# Altium PCB TranRei.PcbDoc
Units mm, origin at the board's own origin, x right, y up, seen from the top; angles counter-clockwise.
Board outline 152.4 x 101.6 mm, 2 copper layers (Top Layer, Bottom Layer); 32 components, 22 nets, 127 pads, 0 vias.
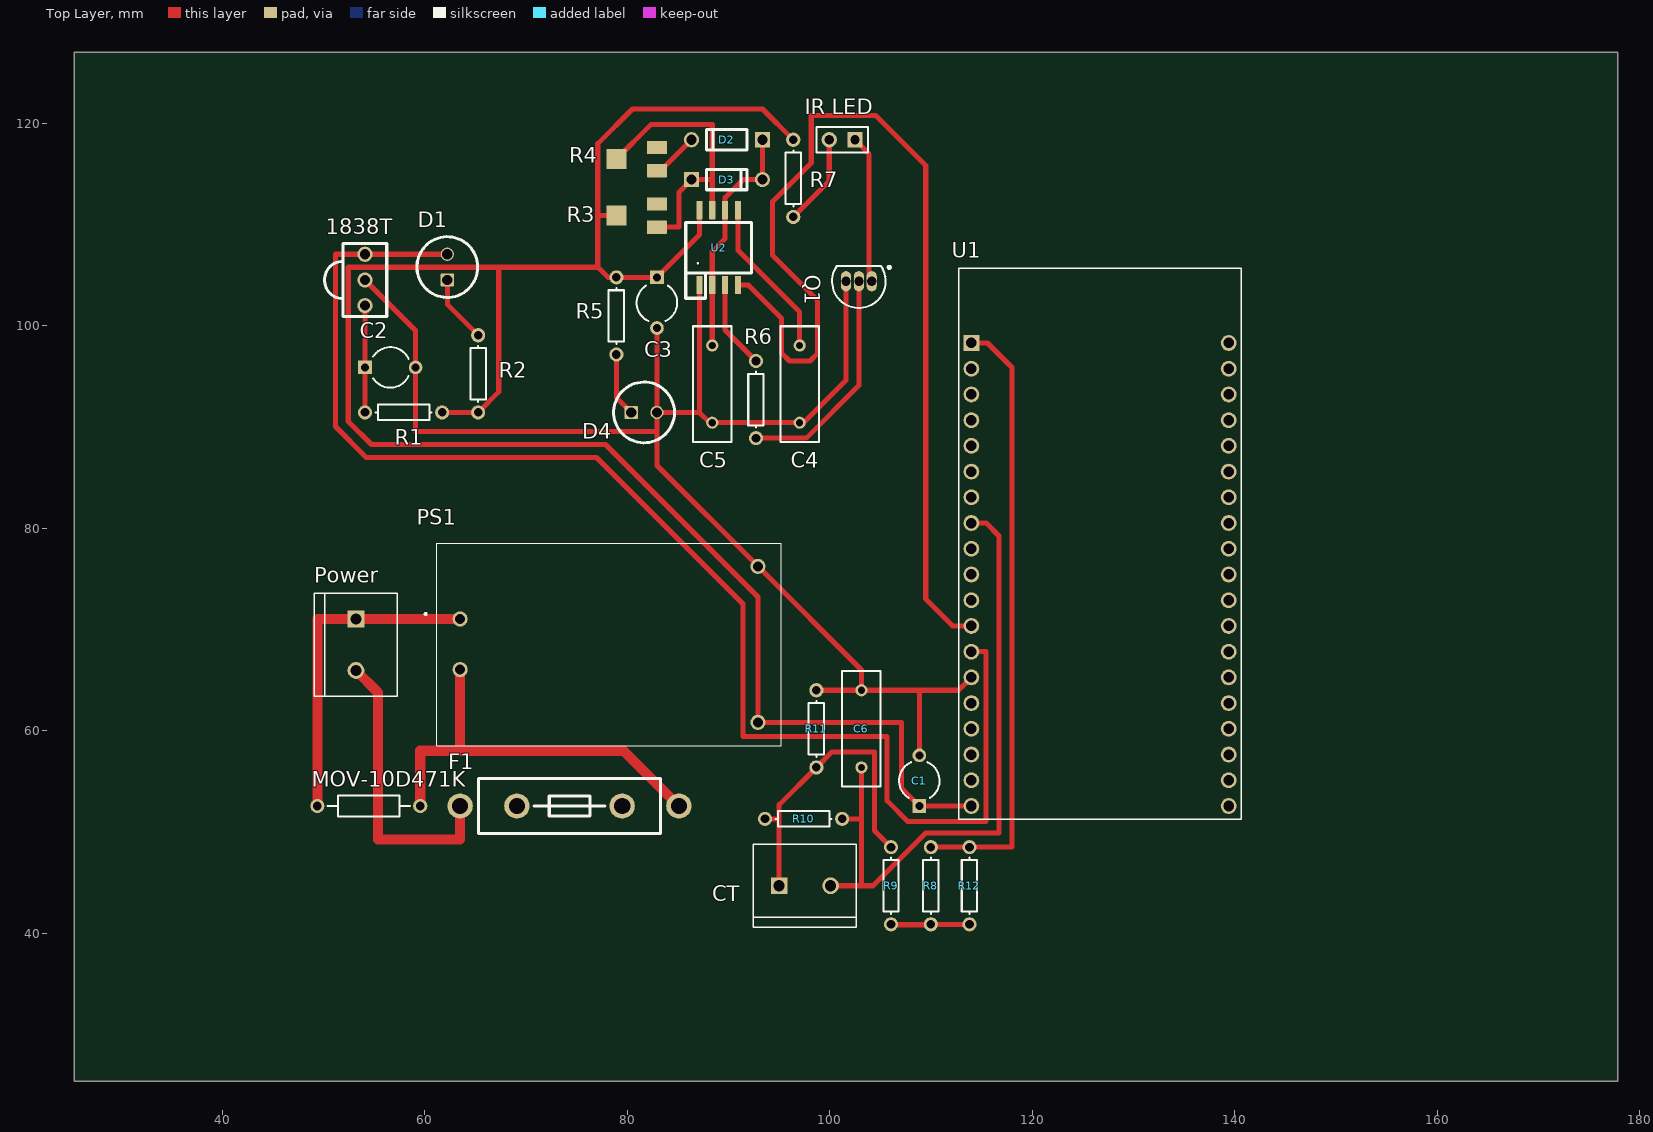
[diagram p0: Top Layer view]
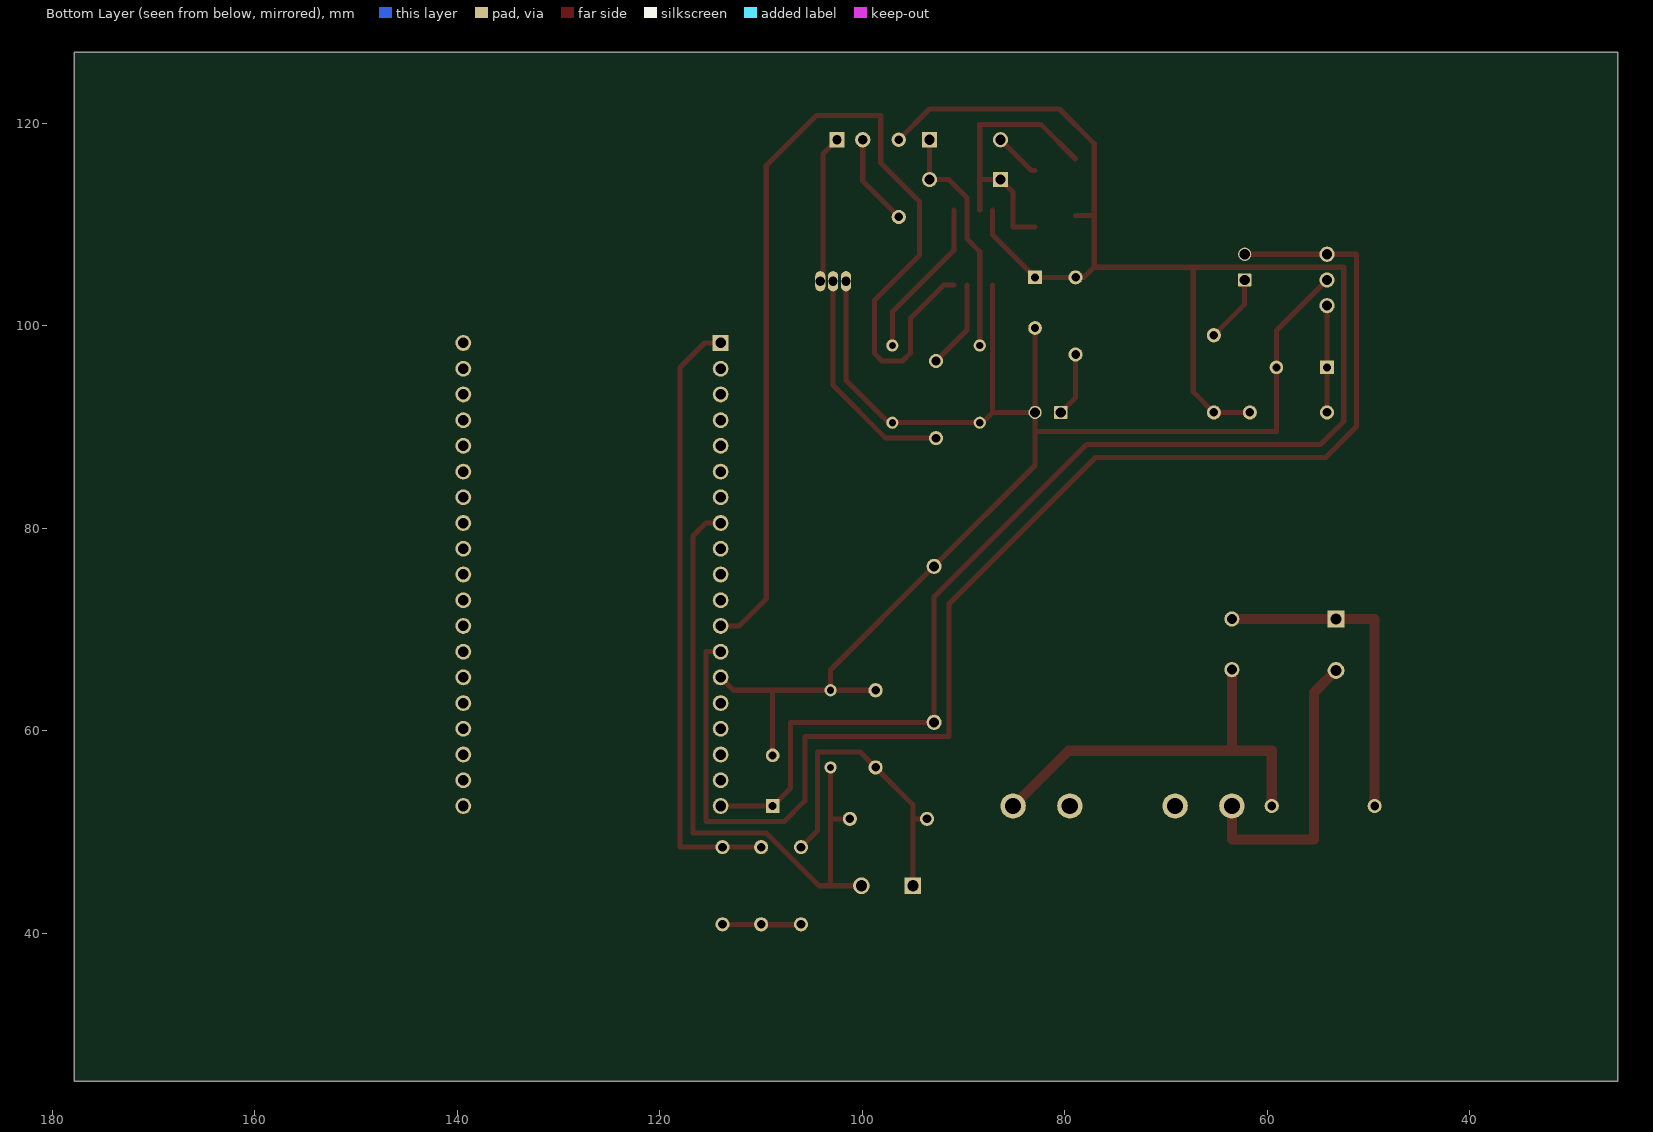
[diagram p1: Bottom Layer view, seen from below]

## Layer stack, top to bottom
Top Solder: solder mask 0.0102, Solder Resist, Dk 3.5
Top Layer: signal copper 0.0356
Dielectric 1: dielectric 0.32, FR-4, Dk 4.8
Bottom Layer: signal copper 0.0356
Bottom Solder: solder mask 0.0102, Solder Resist, Dk 3.5

## Board outline
25.4,25.4 177.8,25.4 177.8,127 25.4,127

## Design rules (kind name [scope] priority, off if disabled: settings)
Clearance [All] p1: gap=0.254 ignorepadtopadclearanceinfootprint=FALSE except(0: Arc-Hole Track-Hole SMDPad-Hole THPad-Hole Via-Hole Fill-Hole Poly-Hole Region-Hole Text-Hole)
PolygonConnect [All] p1: connectstyle=Relief reliefconductorwidth=0.254 reliefentries=4 polygonreliefangle="90 Angle" airgapwidth=0.254
RoutingVias [All] p1: holewidth=0.711 width=1.27 viastyle="Through Hole" minholewidth=0.711 minwidth=1.27 maxholewidth=0.711 maxwidth=1.27
SolderMaskExpansion [All] p1: expansion=0.102
Width [All] p1: maxlimit=1 minlimit=0.3 preferedwidth=0.5
30 further rules are at their usual default settings.

## Components (designator, comment, footprint, x,y, rotation, side; value= is the part's Value field where it differs from the comment)
1838T "Header 3" "TSOP 1838T" 54.102,104.521 r270 top
C1 "Cap2" CAPR5-4X5 108.839,55.078 r90 top value=220uF
C2 "Cap2" CAPR5-4X5 56.602,95.885 r0 top value=100uF
C3 "Cap2" CAPR5-4X5 82.931,102.275 r270 top value=100uF
C4 "Cap" RAD-0.3 97.028,94.234 r90 top value=100nF
C5 "Cap" RAD-0.3 88.392,94.234 r90 top value=1nF
C6 "Cap" RAD-0.3 103.124,60.198 r270 top value=100nF
CT "282837-2" TE_282837-2 97.536,44.704 r0 top
D1 "LED" LED 62.23,105.791 r90 top
D2 "Diode 1N4148" Diode 89.845,118.364 r180 top
D3 "Diode 1N4148" Diode 89.845,114.427 r0 top
D4 "LED" LED 81.661,91.44 r0 top
F1 "Fuse" "Fuse Holder" 74.3,52.578 r180 top
"IR LED" "Header 2" HDR1X2 102.489,118.364 r180 top
MOV-10D471K "" AXIAL-0.4 54.483,52.578 r180 top value=1K
Power "282837-2" TE_282837-2 53.213,68.5 r270 top
PS1 "HLK-PM01" HLKPM01 63.5,71.04 r0 top
Q1 "BC547" TO-226-AA 102.87,104.394 r90 top
R1 "Res1" AXIAL-0.3 57.912,91.44 r0 top value=100R
R2 "Res1" AXIAL-0.3 65.278,95.25 r270 top value=1K2
R3 "Res Tap" "Square Trimpot" 80.931,110.878 r90 top value=10K
R4 "Res Tap" "Square Trimpot" 80.931,116.459 r90 top value=20K
R5 "Res1" AXIAL-0.3 78.931,100.965 r270 top value=1K2
R6 "Res1" AXIAL-0.3 92.71,92.71 r270 top value=10K
R7 "Res1" AXIAL-0.3 96.393,114.554 r90 top value=1K2
R8 "Res1" AXIAL-0.3 109.982,44.704 r90 top value=1K
R9 "Res1" AXIAL-0.3 106.045,44.704 r270 top value=2K2
R10 "Res1" AXIAL-0.3 97.409,51.308 r0 top value=100K
R11 "Res1" AXIAL-0.3 98.679,60.198 r270 top value=1K
R12 "Res1" AXIAL-0.3 113.792,44.704 r90 top value=1K
U1 "ESP32-DEVKITC-32D" MODULE_ESP32-DEVKITC-32D 126.683,78.538 r0 top
U2 "NE555P" "NE555 SOP" 89.027,107.713 r0 top

## Footprints (in the part's own frame and the unit in brackets; to place one, negate y for a bottom-side part, rotate by r counter-clockwise, add the part's x,y. Pads: shape width x height; smd on the part's side, far side on the other; paste and mask are expansions set on the pad)
AXIAL-0.3 [mm] "Axial Device, Thru-Hole; 2 Leads; 0.3 in Pin Spacing"
  round 1.4 hole 0.85: 1(-3.81,0) 2(3.81,0)
  silkscreen extent -2.77,-0.76 2.77,0.76
AXIAL-0.4 [mm] "Axial Device, Thru-Hole; 2 Leads; 0.4 in Pin Spacing"
  round 1.4 hole 0.85: 1(-5.08,0) 2(5.08,0)
  silkscreen extent -4.06,-1.02 4.06,1.02
CAPR5-4X5 [mm] "Capacitor; 2 Leads"
  rect 1.35x1.35 hole 0.8: 1(-2.5,0)
  round 1.35 hole 0.8: 2(2.5,0)
  silkscreen extent -1.69,-2 1.82,2
Diode [mm] "1N4448"
  rect 1.5x1.5 hole 1 mask+0.1: 1(-3.5,0) 1(-3.5,0)
  round 1.5 hole 1 mask+0.1: 2(3.5,0)
  silkscreen extent -2,-1 2,1
"Fuse Holder" [mm] "5x20mm"
  round 2.5 hole 1.6 mask+0.2: 1(-10.8,0) 1(-10.8,0) 1(-10.8,0) 1(-10.8,0) 1(-10.8,0) 1(-10.8,0) 2(-5.2,0) 2(-5.2,0) 3(5.2,0) 4(10.8,0)
  silkscreen extent -9,-2.7 9,2.7
HDR1X2 [mm] "Connector; Header; 2 Position"
  rect 1.5x1.5 hole 0.9: 1(0,0)
  round 1.5 hole 0.9: 2(2.54,0)
  silkscreen extent -1.27,-1.27 3.81,1.27
HLKPM01 [mm]
  round 1.5 hole 1: 1(0,0) 2(0,-5) 3(29.4,5.2) 4(29.4,-10.2)
  silkscreen extent -3.5,-12.5 31.7,7.5
LED [mm] "LED"
  rrect10% 1.3x1.3 hole 1 mask+0.1: 1(-1.27,0)
  round 1.3 hole 1 mask+0.1: 2(1.27,0)
  silkscreen extent -3,-3 3,3
MODULE_ESP32-DEVKITC-32D [mm]
  rect 1.56x1.56 hole 1.04: 1(-12.7,19.76)
  round 1.56 hole 1.04: 2(-12.7,17.22) 3(-12.7,14.68) 4(-12.7,12.14) 5(-12.7,9.6) 6(-12.7,7.06) 7(-12.7,4.52) 8(-12.7,1.98) 9(-12.7,-0.56) 10(-12.7,-3.1) 11(-12.7,-5.64) 12(-12.7,-8.18) 13(-12.7,-10.72) 14(-12.7,-13.26) 15(-12.7,-15.8) 16(-12.7,-18.34) 17(-12.7,-20.88) 18(-12.7,-23.42) 19(-12.7,-25.96) 20(12.7,19.76) 21(12.7,17.22) 22(12.7,14.68) 23(12.7,12.14) 24(12.7,9.6) 25(12.7,7.06) 26(12.7,4.52) 27(12.7,1.98) 28(12.7,-0.56) 29(12.7,-3.1) 30(12.7,-5.64) 31(12.7,-8.18) 32(12.7,-10.72) 33(12.7,-13.26) 34(12.7,-15.8) 35(12.7,-18.34) 36(12.7,-20.88) 37(12.7,-23.42) 38(12.7,-25.96)
  silkscreen extent -13.95,-27.25 13.95,27.15
"NE555 SOP" [mm] "PS G8"
  rrect10% 0.6x1.8 smd mask+0.07: 1(-1.905,-3.7) 1(-1.905,-3.7) 2(-0.635,-3.7) 3(0.635,-3.7) 4(1.905,-3.7) 5(1.905,3.7) 6(0.635,3.7) 7(-0.635,3.7) 8(-1.905,3.7)
  Top Layer region: -0.635,-3.065
  Top Layer region: -0.635,-5.097
  silkscreen extent -3.25,-5 3.25,2.5
RAD-0.3 [mm] "Radial Cap, Thru-Hole; 2 Leads; 0.3 in Pin Spacing"
  round 1.2 hole 0.7: 1(-3.81,0) 2(3.81,0)
  silkscreen extent -5.71,-1.91 5.71,1.91
"Square Trimpot" [mm] "3314J-1"
  rrect10% 1.3x2 smd: 1(-1.15,-2) 1(-1.15,-2) 1(-1.15,-2) 2(1.15,-2)
  rrect10% 2x2 smd: 3(0,2)
TE_282837-2 [mm]
  rect 1.65x1.65 hole 1.1: 1(-2.54,0)
  round 1.65 hole 1.1: 2(2.54,0)
  silkscreen extent -5.08,-4.1 5.08,4.1
TO-226-AA [mm] "TO, Flat Index; 3 In-Line, Axial Leads; Body Dia. 4.8mm; Leads 0.55 x 0.51 mm (max)"
  oval 2x1 hole 0.9: 1(0,-1.27) 2(0,0) 3(0,1.27)
  silkscreen extent -2.65,-3.13 1.52,2.65, body extent -2.65,-2.66 1.52,2.66, height 5.33
"TSOP 1838T" [mm] "IR Receiver"
  round 1.5 hole 1 mask+0.1: 1(-2.54,0) 2(0,0) 3(2.54,0)
  silkscreen extent -3.6,-4 3.6,2.15

## Part data
1838T: "Header, 3-Pin", LatestRevisionDate=17-Jul-2002, LatestRevisionNote="Re-released for DXP Platform.", Publisher="Altium Limited"
C1 C2 C3 C4 C5 C6: "Capacitor", Publisher="Altium Limited"
  C1 C2 C3: PackageDescription="Capacitor; 2 Leads", PackageReference=CAPR5-4X5, Published=23-Sep-2002
  C4 C5 C6: LatestRevisionDate=17-Jul-2002, LatestRevisionNote="Re-released for DXP Platform.", PackageDescription="Radial Cap, Thru-Hole; 2 Leads; 0.3 in Pin Spacing", PackageReference=RAD-0.3, Published=8-Jun-2000
CT Power: "Connector Terminal Blocks Receptacle 2 Position 5.08mm Solder Straight Thru-Hole 13.5A/Contact", Package=None, Digi-Key_Part_Number=A113320-ND, Digi-Key_Purchase_URL=https://www.digikey.in/product-detail/en/te-connectivity-amp-connectors/282837-2/A113320-ND/2187973?utm_source=snapeda&utm_medium=aggregator&utm_campaign=symbol, MF="TE Connectivity", MP=282837-2, SnapEDA_Link=https://www.snapeda.com/parts/282837-2/TE%20Connectivity%20AMP%20Connectors/view-part/2549980/?ref=snap, TE_purchase_URL=https://www.te.com/usa-en/product-282837-2.html?te_bu=Cor&te_type=disp&te_campaign=seda_glo_cor-seda-global-disp-prtnr-fy19-seda-model-bom-cta_sma-317_1&elqCampaignId=32493
D1 D4: library part LED0, "Typical INFRARED GaAs LED", LatestRevisionDate=08-Jul-2005, LatestRevisionNote="Mech Layer 1 removed.", PackageDescription="LED; 2 Leads", PackageReference=LED-0, Published=8-Jun-2000, Publisher="Altium Limited"
D2 D3: library part "Diode 1N4448", "High Conductance Fast Diode", Code_JEDEC=DO-204-AH, ComponentLink1Description="Manufacturer Link", ComponentLink1URL=http://www.fairchildsemi.com/, ComponentLink2Description=Datasheet, ComponentLink2URL=http://www.fairchildsemi.com/ds/1N%2F1N4448.pdf, DatasheetVersion=1997, LatestRevisionDate=17-Jul-2002, LatestRevisionNote="Re-released for DXP Platform.", PackageDescription="Diode, Axial; Body 3.8 x 1.9 mm (LxDia. max), Lead Dia. 0.53 mm (max)", PackageReference=DO-35, Published=8-Jun-2000, Publisher="Altium Limited"
F1: library part "Fuse 2", LatestRevisionDate=17-Jul-2002, LatestRevisionNote="Re-released for DXP Platform.", PackageDescription="Thru-Hole; 2 Leads", PackageReference=PIN-W2/E2.8, Published=8-Jun-2000, Publisher="Altium Limited"
"IR LED": "Header, 2-Pin", LatestRevisionDate=17-Jul-2002, LatestRevisionNote="Re-released for DXP Platform.", Publisher="Altium Limited"
MOV-10D471K: library part Res2, "Resistor", LatestRevisionDate=17-Jul-2002, LatestRevisionNote="Re-released for DXP Platform.", PackageDescription="Axial Device, Thru-Hole; 2 Leads; 0.4 in Pin Spacing", PackageReference=AXIAL-0.4, Published=8-Jun-2000, Publisher="Altium Limited"
PS1: "<b>Ultra-compact power module</b><p> Source: <a href=\"https://datasheet.lcsc.com/szlcsc/1906201102_HI-LINK-HLK-PM03_C209904.pdf\"> Datasheet </a>", Package="Package Analog Devices", Availability=Unavailable, MF=Hi-link, MP=hlk-pm01, Price=None, SnapEDA_Link=https://www.snapeda.com/parts/hlk-pm01/Hi-link/view-part/2875605/?ref=snap
Q1: library part NPN, "NPN Bipolar Transistor", Code_JEDEC=TO-226-AA, LatestRevisionDate=17-Jul-2002, LatestRevisionNote="Re-released for DXP Platform.", PackageDescription="TO, Flat Index; 3 In-Line, Axial Leads; Body Dia. 4.8mm; Leads 0.55 x 0.51 mm (max)", PackageReference=TO-226-AA, Published=8-Jun-2000, Publisher="Altium Limited"
R1 R2 R5 R6 R7 R8 R9 R10 R11 R12: "Resistor", LatestRevisionDate=17-Jul-2002, LatestRevisionNote="Re-released for DXP Platform.", PackageDescription="Axial Device, Thru-Hole; 2 Leads; 0.3 in Pin Spacing", PackageReference=AXIAL-0.3, Published=8-Jun-2000, Publisher="Altium Limited"
R3 R4: "Tapped Resistor", LatestRevisionDate=17-Jul-2002, LatestRevisionNote="Re-released for DXP Platform.", PackageDescription="Variable Resistor, Thru-Hole; 3 Leads", PackageReference=VR3, Published=24-Mar-1999, Publisher="Altium Limited", Set Position=0.5, Sim Note="Enter the Resistance value and the set point into parameter fields."
U1: "- Transceiver; 802.11 b/g/n _Wi-Fi, WiFi, WLAN_, Bluetooth® Smart Ready 4.x Dual Mode For Use With ESP-WROOM-32", Package=None, Availability=Unavailable, MF="Espressif Systems", MP=ESP32-DEVKITC-32D, Price=None, SnapEDA_Link=https://www.snapeda.com/parts/ESP32-DEVKITC-32D/Espressif%20Systems/view-part/2777395/?ref=snap
U2: "Single Precision Timer", Package="PDIP-8 Texas Instruments", Arrow_Electronics-Purchase-URL=https://snapeda.com/shop?store=Arrow+Electronics&id=2776400, DigiKey-Purchase-URL=https://snapeda.com/shop?store=DigiKey&id=2776400, MF="Texas Instruments", Mouser-Purchase-URL=https://snapeda.com/shop?store=Mouser&id=2776400, MP=NE555P, SnapEDA_Link=https://www.snapeda.com/parts/NE555P/Texas%20Instruments/view-part/2776400/?ref=snap, Texas_Instruments-Purchase-URL=https://snapeda.com/shop?store=Texas+Instruments&id=2776400

## Nets (pads, with @x,y where several pads share a name; then routed paths per layer and width w, separated by ;. In a path a pad name is that pad's centre, name@x,y a point inside that pad or via, vN(x,y) a via of type N, cw(c..) or ccw(c..) an arc to the next point about the centre after c; other vN are vias at no path point)
3V3: R8.2 R12.2 U1.1 | length 60.4
  Top Layer w0.5: R8.2 R12.2 117.983,48.514 117.983,95.885 115.57,98.298 U1.1
5VDC: C1.1 C3.1 PS1.4 R1.2 R2.2 R3.3 R5.1 R7.2 U1.19 U2.8 | length 197.6
  Top Layer w0.5: R1.2 R2.2 67.31,93.472 67.31,105.775 ; R3.3 77.089,110.878 ; U2.8 87.122,108.966 C3.1 R5.1 78.105,104.775 77.089,105.791 ; R7.2 93.345,121.412 80.518,121.412 77.089,117.983 77.089,110.878 ; U1.19 C1.1 107.061,54.356 107.061,60.84 PS1.4 92.9,73.216 77.851,88.265 54.737,88.265 52.451,90.551 52.451,105.775 67.31,105.775 ; 67.31,105.775 77.073,105.775 77.089,105.791 ; 77.089,105.791 77.089,110.878
ADC: C6.2 CT.2 R10.2 U1.8 | length 65
  Top Layer w0.5: CT.2 103.124,44.704 ; R10.2 103.124,51.308 ; C6.2 103.124,51.308 ; U1.8 115.443,80.518 116.713,79.248 116.713,49.911 109.474,49.911 104.267,44.704 103.124,44.704 ; 103.124,44.704 103.124,51.308
GND: 1838T.2 C1.2 C2.2 C3.2 C4.1 C5.1 C6.1 D4.2 PS1.3 Q1.3 R11.1 U1.14 U2.1 | length 150.5
  Top Layer w0.5: 1838T.2 59.102,99.521 C2.2 59.102,89.535 82.931,89.535 ; C3.2 D4.2 ; U2.1@87.122,104.013 87.122,91.44 ; R11.1 C6.1 ; Q1.3 101.6,94.615 97.409,90.424 C4.1 C5.1 88.138,90.424 87.122,91.44 ; C1.2 108.839,64.008 ; U1.14 112.713,64.008 108.839,64.008 ; 82.931,89.535 82.931,86.209 PS1.3 103.124,66.016 C6.1 ; 82.931,89.535 D4.2 ; D4.2 87.122,91.44 ; C6.1 108.839,64.008
Net1838T_3: 1838T.3 C2.1 R1.1 | length 10.5
  Top Layer w0.5: R1.1 C2.1 1838T.3
NetC4_2: C4.2 U2.5 | length 15.9
  Top Layer w0.5: U2.5 90.932,107.442 97.028,101.346 C4.2
NetC5_2: C5.2 D2.1 D3.2 U2.2 U2.6 | length 23.5
  Top Layer w0.5: C5.2 U2.2 88.392,107.315 89.662,108.585 U2.6 89.662,112.649 91.44,114.427 D3.2 D2.1@93.345,118.364
NetCT_1: CT.1 R9.1 R10.1 R11.2 | length 31
  Top Layer w0.5: R10.1 94.996,51.308 ; CT.1 94.996,51.308 ; R9.1 104.394,50.165 104.394,57.912 100.203,57.912 R11.2 94.996,52.705 94.996,51.308
NetD1_1: D1.1 R2.1 | length 6.7
  Top Layer w0.5: D1.1 62.23,102.108 R2.1
NetD2_2: D2.2 R4.1 | length 4.7
  Top Layer w0.5: R4.1@82.931,115.309 83.29,115.309 D2.2
NetD3_1: D3.1 R3.1 R4.3 U2.7 | length 28.8
  Top Layer w0.5: R4.3 82.36,119.888 88.392,119.888 88.392,114.427 ; R3.1@82.931,109.728 85.1,109.728 85.1,113.182 86.345,114.427 88.392,114.427 ; U2.7 88.392,114.427
NetD4_1: D4.1 R5.2 | length 6.3
  Top Layer w0.5: R5.2 78.931,92.9 D4.1
NetF1_1: F1.1 MOV-10D471K.1 PS1.2 | length 41.3
  Top Layer w1: MOV-10D471K.1 59.563,58.039 63.5,58.039 ; PS1.2 63.5,58.039 ; F1.1@85.1,52.578 79.639,58.039 63.5,58.039
NetF1_4: F1.4 Power.2 | length 29
  Top Layer w1: Power.2 55.372,63.801 55.372,49.276 63.5,49.276 F1.4
"NetIR LED_1": "IR LED.1" Q1.1 | length 14.7
  Top Layer w0.5: 102.489,118.364 103.874,116.979 103.874,104.66 Q1.1
"NetIR LED_2": "IR LED.2" R7.1 | length 9.1
  Top Layer w0.5: R7.1 99.949,114.3 99.949,118.364
NetMOV-10D471K_2: MOV-10D471K.2 Power.1 PS1.1 | length 32.6
  Top Layer w1: MOV-10D471K.2 49.403,71.04 Power.1 PS1.1
NetQ1_2: Q1.2 R6.2 | length 22.6
  Top Layer w0.5: R6.2 97.663,88.9 102.87,94.107 Q1.2
NetR6_1: R6.1 U2.3 | length 8.8
  Top Layer w0.5: U2.3 89.662,99.568 R6.1
NetR8_1: R8.1 R9.2 R12.1 | length 7.9
  Top Layer w0.5: R9.2@105.918,40.894 106.027,40.85 109.982,40.85 110.026,40.894 R12.1
R: 1838T.1 D1.2 U1.13 | length 138.1
  Top Layer w0.5: D1.2 1838T.1 51.181,107.061 51.181,90.043 54.229,86.995 76.962,86.995 91.44,72.517 91.44,59.436 105.664,59.436 105.664,53.086 107.696,51.054 115.443,51.054 115.443,67.818 U1.13
Trans: U1.12 U2.4 | length 102
  Top Layer w0.5: U2.4 91.948,104.013 95.25,100.711 95.25,97.282 96.012,96.52 98.044,96.52 98.806,97.282 98.806,102.489 94.361,106.934 94.361,112.268 98.171,116.078 98.171,120.777 104.521,120.777 109.474,115.824 109.474,73.025 112.141,70.358 U1.12
pads on no net: F1.2 F1.3 R3.2 R4.2 U1.2 U1.3 U1.4 U1.5 U1.6 U1.7 U1.9 U1.10 U1.11 U1.15 U1.16 U1.17 U1.18 U1.20 U1.21 U1.22 U1.23 U1.24 U1.25 U1.26 U1.27 U1.28 U1.29 U1.30 U1.31 U1.32 U1.33 U1.34 U1.35 U1.36 U1.37 U1.38